# Altium PCB 400236.PcbDoc (part 3 of 7)
Units mm, origin at the board's own origin, x right, y up, seen from the top; angles counter-clockwise.
Board outline 136.53 x 63.5 mm, 4 copper layers (Top Layer, Mid-Layer 1, Mid-Layer 2, Bottom Layer), stack 1.49 mm thick; 344 components, 236 nets, 1364 pads, 1393 vias.
Unrouted connection lines stored in the file: 6.
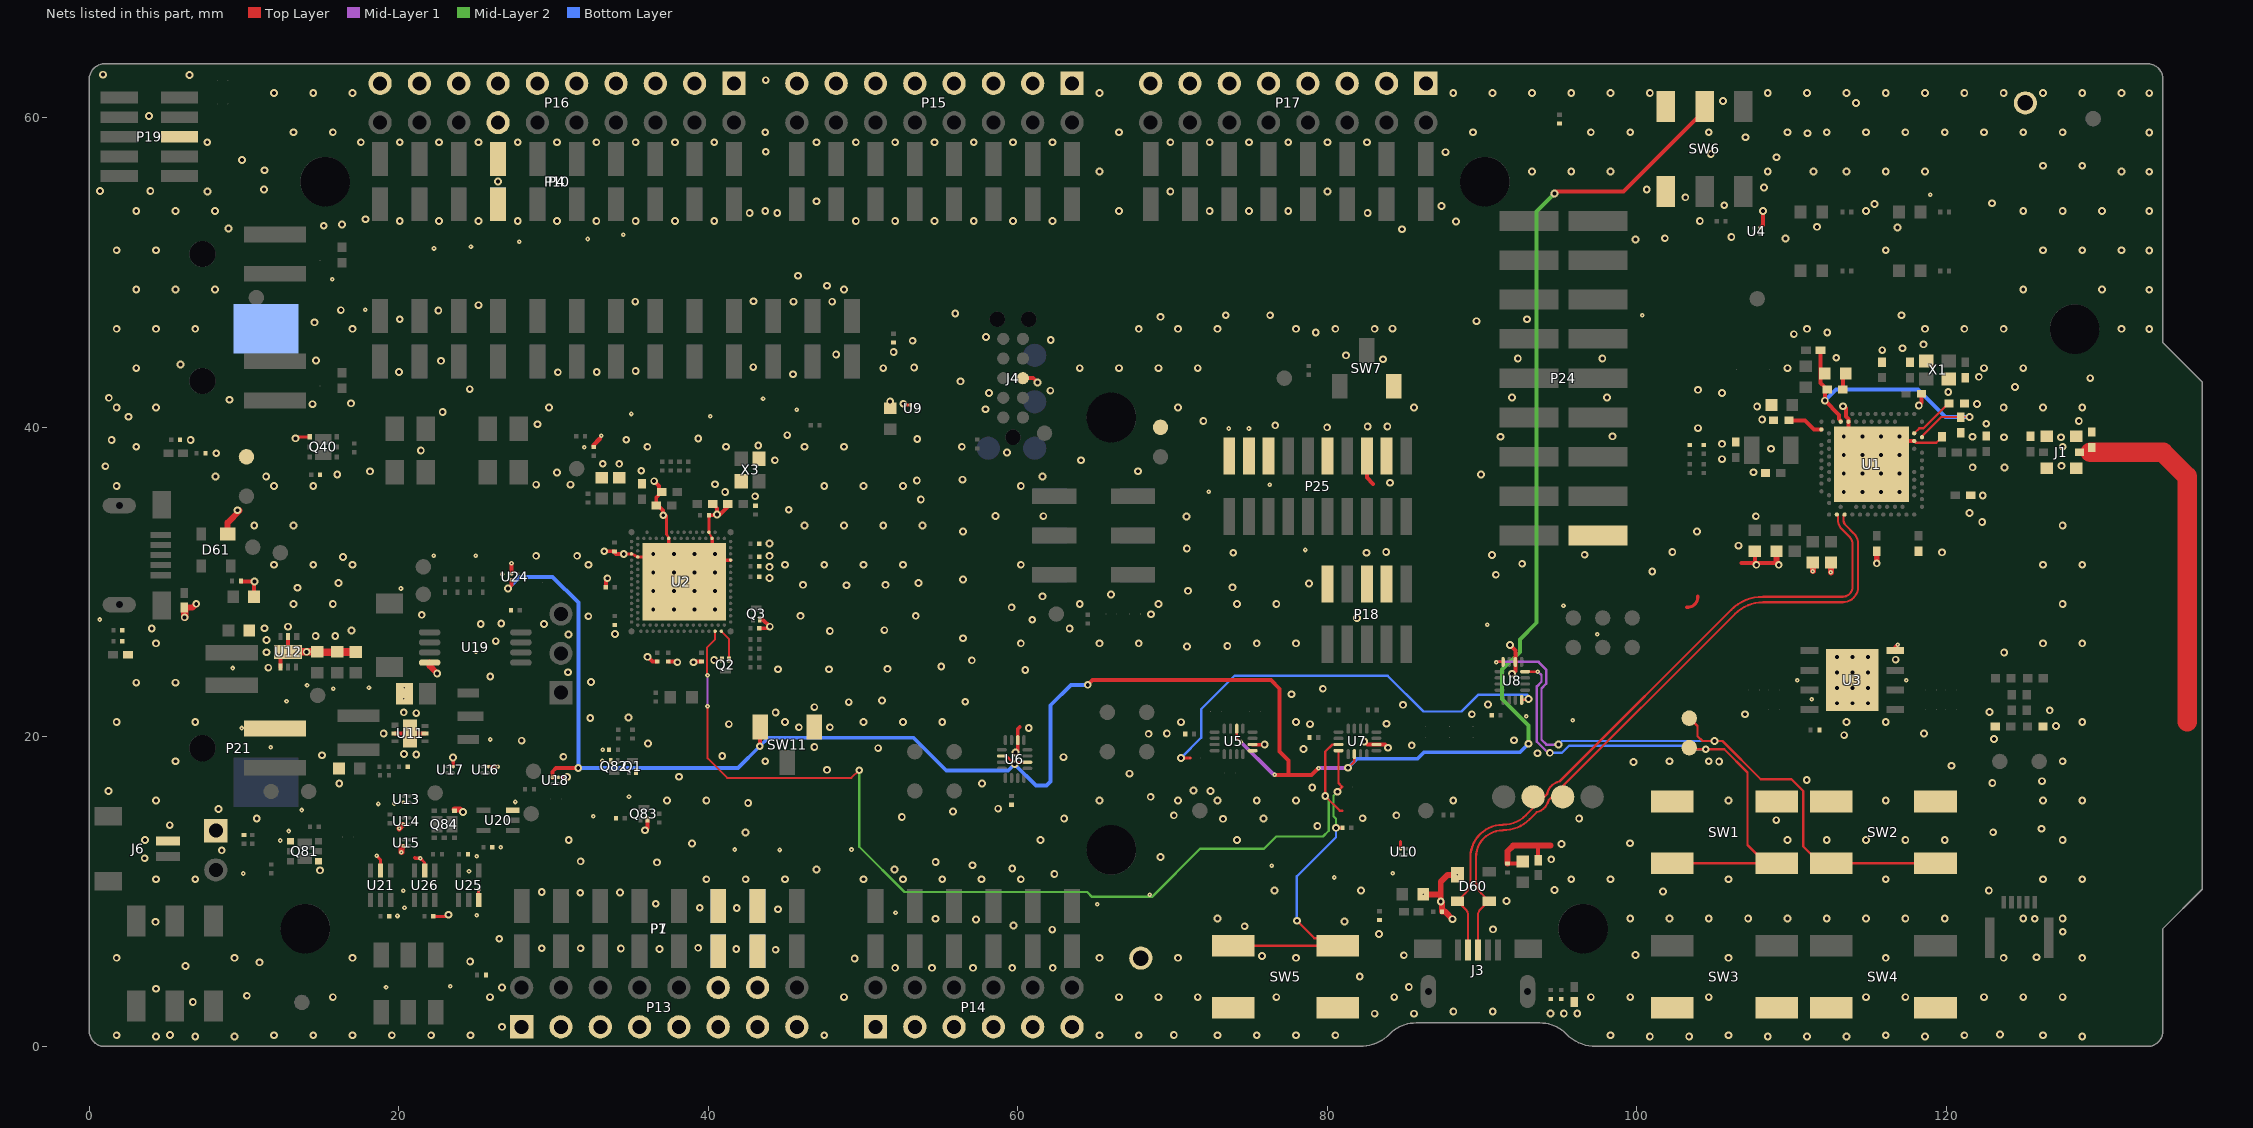
[diagram p4: the nets of this part, all layers, seen from the top]

## Part data (continued)
R3 R4 R99: library part R0201-10k, "Resistor, ±1%, 0.05W", Manufacturer=N.A., Part number IPS=00000001255, Part number NEMS=100100065, Part number Norautron=26107101, Artikkelnr Noca=N.A., Author=rsk, Component Class=Resistors, Component Status=Active, ComponentLink1Description=Datasheet, ComponentLink1URL=N.A., ComponentLink2Description="Supplier link", ComponentLink2URL=N.A., Footprint Doc=0201, HelpURL=N.A., LatestRevisionDate=2014-11-13, Manufacturer Part Number=N.A., Note="Chip Res 1%", Pad Count=2, Part Number=R0201-10k, PartId=100100065, Published=2014-11-13, Supplier 1=N.A., Supplier 2=N.A., Supplier Part Number 1=N.A., Supplier Part Number 2=N.A.
R5 R88 R92 R94: library part R0201-10M, "Resistor, ±1%, 0.05W", Manufacturer=N.A., Part number IPS=00000001426, Part number NEMS=100100105, Artikkelnr Noca=N.A., Author=rsk, Component Class=Resistors, Component Status=Active, ComponentLink1Description=Datasheet, ComponentLink1URL=N.A., ComponentLink2Description="Supplier link", ComponentLink2URL=N.A., Footprint Doc=0201, HelpURL=N.A., LatestRevisionDate=2014-11-13, Manufacturer Part Number=N.A., Note="Chip Res 1%", Pad Count=2, Part Number=R0201-10M, Part number Norautron=N.A., PartId=100100105, Published=2014-11-13, Supplier 1=N.A., Supplier 2=N.A., Supplier Part Number 1=N.A., Supplier Part Number 2=N.A.
R6 R26: library part R0201-47k, "Resistor, ±1%, 0.05W", Manufacturer=N.A., Part number IPS=00000001423, Part number NEMS=100100076, Artikkelnr Noca=N.A., Author=rsk, Component Class=Resistors, Component Status=Active, ComponentLink1Description=Datasheet, ComponentLink1URL=N.A., ComponentLink2Description="Supplier link", ComponentLink2URL=N.A., Footprint Doc=0201, HelpURL=N.A., LatestRevisionDate=2014-11-13, Manufacturer Part Number=N.A., Note="Chip Res 1%", Pad Count=2, Part Number=R0201-47k, Part number Norautron=N.A., PartId=100100076, Published=2014-11-13, Supplier 1=N.A., Supplier 2=N.A., Supplier Part Number 1=N.A., Supplier Part Number 2=N.A.
R7: library part R0201-560, "Resistor, ±1%, 0.05W", Manufacturer=N.A., Part number NEMS=100100038, Artikkelnr Noca=N.A., Author=rsk, Component Class=Resistors, Component Status=Active, ComponentLink1Description=Datasheet, ComponentLink1URL=N.A., ComponentLink2Description="Supplier link", ComponentLink2URL=N.A., Footprint Doc=0201, HelpURL=N.A., LatestRevisionDate=2014-11-13, Manufacturer Part Number=N.A., Note="Chip Res 1%", Pad Count=2, Part Number=R0201-560, Part number IPS=N.A., Part number Norautron=N.A., PartId=100100038, Published=2014-11-13, Supplier 1=N.A., Supplier 2=N.A., Supplier Part Number 1=N.A., Supplier Part Number 2=N.A.
R8 R95: library part R0201-100k, "Resistor, ±1%, 0.05W", Manufacturer=N.A., Part number IPS=00000001419, Part number NEMS=100100080, Part number Norautron=26108487, Artikkelnr Noca=N.A., Author=rsk, Component Class=Resistors, Component Status=Active, ComponentLink1Description=Datasheet, ComponentLink1URL=N.A., ComponentLink2Description="Supplier link", ComponentLink2URL=N.A., Footprint Doc=0201, HelpURL=N.A., LatestRevisionDate=2014-11-13, Manufacturer Part Number=N.A., Note="Chip Res 1%", Pad Count=2, Part Number=R0201-100k, PartId=100100080, Published=2014-11-13, Supplier 1=N.A., Supplier 2=N.A., Supplier Part Number 1=N.A., Supplier Part Number 2=N.A.
R9: library part R0201-49R9, "Resistor, ±1%, 0.05W", Manufacturer=N.A., Part number NEMS=100100612, Part number Norautron=26107071, Artikkelnr Noca=N.A., Author=getr, Component Class=Resistors, Component Status=Active, ComponentLink1Description=Datasheet, ComponentLink1URL=N.A., ComponentLink2Description="Supplier link", ComponentLink2URL=N.A., Footprint Doc=0201, HelpURL=N.A., LatestRevisionDate=2021-04-15, Manufacturer Part Number=N.A., Note="Chip Res 1%", Pad Count=2, Part Number=R0201-49R9, Part number IPS=N.A., PartId=100100612, Published=2021-04-15, Supplier 1=N.A., Supplier 2=N.A., Supplier Part Number 1=N.A., Supplier Part Number 2=N.A.
R10 R54: library part R0201-N.C., "Not mounted", Manufacturer=N.A., Part number NEMS=100100107, Artikkelnr Noca=N.A., Assembly="Not mounted", Author=rsk, Component Class=Resistors, Component Status=Active, ComponentLink1Description=Datasheet, ComponentLink1URL=N.A., ComponentLink2Description="Supplier link", ComponentLink2URL=N.A., Footprint Doc=0201, HelpURL=N.A., LatestRevisionDate=2014-11-13, Manufacturer Part Number=N.A., Note="Chip Res", Pad Count=2, Part Number=R0201-N.C., Part number IPS=N.A., Part number Norautron=N.A., PartId=100100107, Published=2014-11-13, Supplier 1=N.A., Supplier 2=N.A., Supplier Part Number 1=N.A., Supplier Part Number 2=N.A.
R11 R12 R14 R15 R16 R17 R18 R19: library part R0201-150, "Resistor, ±1%, 0.05W", Manufacturer=N.A., Part number IPS=00000001420, Part number NEMS=100100029, Artikkelnr Noca=N.A., Author=rsk, Component Class=Resistors, Component Status=Active, ComponentLink1Description=Datasheet, ComponentLink1URL=N.A., ComponentLink2Description="Supplier link", ComponentLink2URL=N.A., Footprint Doc=0201, HelpURL=N.A., LatestRevisionDate=2014-11-13, Manufacturer Part Number=N.A., Note="Chip Res 1%", Pad Count=2, Part Number=R0201-150, Part number Norautron=N.A., PartId=100100029, Published=2014-11-13, Supplier 1=N.A., Supplier 2=N.A., Supplier Part Number 1=N.A., Supplier Part Number 2=N.A.
R13: library part R0201-2R2, "Resistor, ±1%, 0.05W", Manufacturer=N.A., Part number NEMS=100100006, Part number Norautron=26470029, Artikkelnr Noca=N.A., Author=rsk, Component Class=Resistors, Component Status=Active, ComponentLink1Description=Datasheet, ComponentLink1URL=N.A., ComponentLink2Description="Supplier link", ComponentLink2URL=N.A., Footprint Doc=0201, HelpURL=N.A., LatestRevisionDate=2014-11-13, Manufacturer Part Number=N.A., Note="Chip Res 1%", Pad Count=2, Part Number=R0201-2R2, Part number IPS=N.A., PartId=100100006, Published=2014-11-13, Supplier 1=N.A., Supplier 2=N.A., Supplier Part Number 1=N.A., Supplier Part Number 2=N.A.
R20 R41 R62 R63 R68 R86 R87 R89 R96: library part R0201-1M0, "Resistor, ±1%, 0.05W", Manufacturer=N.A., Part number IPS=00000001418, Part number NEMS=100100093, Part number Norautron=26107108, Artikkelnr Noca=N.A., Author=rsk, Component Class=Resistors, Component Status=Active, ComponentLink1Description=Datasheet, ComponentLink1URL=N.A., ComponentLink2Description="Supplier link", ComponentLink2URL=N.A., Footprint Doc=0201, HelpURL=N.A., LatestRevisionDate=2014-11-13, Manufacturer Part Number=N.A., Note="Chip Res 1%", Pad Count=2, Part Number=R0201-1M0, PartId=100100093, Published=2014-11-13, Supplier 1=N.A., Supplier 2=N.A., Supplier Part Number 1=N.A., Supplier Part Number 2=N.A.
  R62 R63: Assembly="Not mounted"
R40: library part R0201-150k, "Resistor, ±1%, 0.05W", Manufacturer=N.A., Part number IPS=00000001422, Part number NEMS=100100082, Artikkelnr Noca=N.A., Author=rsk, Component Class=Resistors, Component Status=Active, ComponentLink1Description=Datasheet, ComponentLink1URL=N.A., ComponentLink2Description="Supplier link", ComponentLink2URL=N.A., Footprint Doc=0201, HelpURL=N.A., LatestRevisionDate=2014-11-13, Manufacturer Part Number=N.A., Note="Chip Res 1%", Pad Count=2, Part Number=R0201-150k, Part number Norautron=N.A., PartId=100100082, Published=2014-11-13, Supplier 1=N.A., Supplier 2=N.A., Supplier Part Number 1=N.A., Supplier Part Number 2=N.A.
R43 R45 R90 R91: library part R0402-N.C., "Not mounted", Manufacturer=N.A., Part number NEMS=100100281, Artikkelnr Noca=N.A., Assembly="Not mounted", Author=rsk, Component Class=Resistors, Component Status=Active, ComponentLink1Description=Datasheet, ComponentLink1URL=N.A., ComponentLink2Description="Supplier link", ComponentLink2URL=N.A., Footprint Doc=0402, HelpURL=N.A., LatestRevisionDate=2009-05-08, Manufacturer Part Number=N.A., Note="Chip Res", Pad Count=2, Part Number=R0402-N.C., Part number IPS=N.A., Part number Norautron=N.A., PartId=100100281, Published=2009-05-08, Supplier 1=N.A., Supplier 2=N.A., Supplier Part Number 1=N.A., Supplier Part Number 2=N.A.
R44 R46: library part R0402-0R, "Resistor, ±5%, 0.063W", Manufacturer=N.A., Part number IPS=00000007128, Part number NEMS=100100109, Supplier Part Number 1=146-9661, Artikkelnr Noca=27049000, Author=rsk, Component Class=Resistors, Component Status=Active, ComponentLink1Description=Datasheet, ComponentLink1URL=N.A., ComponentLink2Description="Supplier link", ComponentLink2URL=N.A., Footprint Doc=0402, HelpURL=N.A., LatestRevisionDate=2009-11-23, Manufacturer Part Number=N.A., Note="Chip Res 5%", Pad Count=2, Part Number=R0402-0R, Part number Norautron=N.A., PartId=100100109, Published=2009-05-08, Supplier 1=Farnell, Supplier 2=N.A., Supplier Part Number 2=N.A.
R47 R48 R50 R51: library part R0201-220, "Resistor, ±1%, 0.05W", Manufacturer=N.A., Part number IPS=00000000863, Part number NEMS=100100032, Part number Norautron=26107014, Artikkelnr Noca=N.A., Author=rsk, Component Class=Resistors, Component Status=Active, ComponentLink1Description=Datasheet, ComponentLink1URL=N.A., ComponentLink2Description="Supplier link", ComponentLink2URL=N.A., Footprint Doc=0201, HelpURL=N.A., LatestRevisionDate=2014-11-13, Manufacturer Part Number=N.A., Note="Chip Res 1%", Pad Count=2, Part Number=R0201-220, PartId=100100032, Published=2014-11-13, Supplier 1=N.A., Supplier 2=N.A., Supplier Part Number 1=N.A., Supplier Part Number 2=N.A.
R52 R53: library part R0201-4k7, "Resistor, ±1%, 0.05W", Manufacturer=N.A., Part number IPS=00000001706, Part number NEMS=100100061, Artikkelnr Noca=N.A., Author=rsk, Component Class=Resistors, Component Status=Active, ComponentLink1Description=Datasheet, ComponentLink1URL=N.A., ComponentLink2Description="Supplier link", ComponentLink2URL=N.A., Footprint Doc=0201, HelpURL=N.A., LatestRevisionDate=2014-11-13, Manufacturer Part Number=N.A., Note="Chip Res 1%", Pad Count=2, Part Number=R0201-4k7, Part number Norautron=N.A., PartId=100100061, Published=2014-11-13, Supplier 1=N.A., Supplier 2=N.A., Supplier Part Number 1=N.A., Supplier Part Number 2=N.A.
R69: library part R0201-866, "Resistor, ±1%, 0.05W", Manufacturer=N.A., Part number IPS=00000004368, Part number NEMS=100100042, Artikkelnr Noca=N.A., Author=rsk, Component Class=Resistors, Component Status=Active, ComponentLink1Description=Datasheet, ComponentLink1URL=N.A., ComponentLink2Description="Supplier link", ComponentLink2URL=N.A., Footprint Doc=0201, HelpURL=N.A., LatestRevisionDate=2019-07-16, Manufacturer Part Number=N.A., Note="Chip Res 1%", Pad Count=2, Part Number=R0201-866, Part number Norautron=N.A., PartId=100100042, Published=2019-07-16, Supplier 1=N.A., Supplier 2=N.A., Supplier Part Number 1=N.A., Supplier Part Number 2=N.A.
R82: library part R0201-330k, "Resistor, ±1%, 0.05W", Manufacturer=N.A., Part number IPS=00000001424, Part number NEMS=100100087, Artikkelnr Noca=N.A., Author=rsk, Component Class=Resistors, Component Status=Active, ComponentLink1Description=Datasheet, ComponentLink1URL=N.A., ComponentLink2Description="Supplier link", ComponentLink2URL=N.A., Footprint Doc=0201, HelpURL=N.A., LatestRevisionDate=2014-11-13, Manufacturer Part Number=N.A., Note="Chip Res 1%", Pad Count=2, Part Number=R0201-330k, Part number Norautron=N.A., PartId=100100087, Published=2014-11-13, Supplier 1=N.A., Supplier 2=N.A., Supplier Part Number 1=N.A., Supplier Part Number 2=N.A.
R83: library part R0201-820k, "Resistor, ±1%, 0.05W", Manufacturer=N.A., Part number IPS=00000001427, Part number NEMS=100100092, Artikkelnr Noca=N.A., Author=rsk, Component Class=Resistors, Component Status=Active, ComponentLink1Description=Datasheet, ComponentLink1URL=N.A., ComponentLink2Description="Supplier link", ComponentLink2URL=N.A., Footprint Doc=0201, HelpURL=N.A., LatestRevisionDate=2014-11-13, Manufacturer Part Number=N.A., Note="Chip Res 1%", Pad Count=2, Part Number=R0201-820k, Part number Norautron=N.A., PartId=100100092, Published=2014-11-13, Supplier 1=N.A., Supplier 2=N.A., Supplier Part Number 1=N.A., Supplier Part Number 2=N.A.
R84: library part R0201-120k, "Resistor, ±1%, 0.05W", Manufacturer=N.A., Part number IPS=00000001425, Part number NEMS=100100081, Artikkelnr Noca=N.A., Author=rsk, Component Class=Resistors, Component Status=Active, ComponentLink1Description=Datasheet, ComponentLink1URL=N.A., ComponentLink2Description="Supplier link", ComponentLink2URL=N.A., Footprint Doc=0201, HelpURL=N.A., LatestRevisionDate=2014-11-13, Manufacturer Part Number=N.A., Note="Chip Res 1%", Pad Count=2, Part Number=R0201-120k, Part number Norautron=N.A., PartId=100100081, Published=2014-11-13, Supplier 1=N.A., Supplier 2=N.A., Supplier Part Number 1=N.A., Supplier Part Number 2=N.A.
R85: library part R0201-470k, "Resistor, ±1%, 0.05W", Manufacturer=N.A., Part number IPS=00000001428, Part number NEMS=100100089, Artikkelnr Noca=N.A., Author=rsk, Component Class=Resistors, Component Status=Active, ComponentLink1Description=Datasheet, ComponentLink1URL=N.A., ComponentLink2Description="Supplier link", ComponentLink2URL=N.A., Footprint Doc=0201, HelpURL=N.A., LatestRevisionDate=2014-11-13, Manufacturer Part Number=N.A., Note="Chip Res 1%", Pad Count=2, Part Number=R0201-470k, Part number Norautron=N.A., PartId=100100089, Published=2014-11-13, Supplier 1=N.A., Supplier 2=N.A., Supplier Part Number 1=N.A., Supplier Part Number 2=N.A.
R93: library part R0201-1k0, "Resistor, ±1%, 0.05W", Manufacturer=N.A., Part number IPS=00000005786, Part number NEMS=100100043, Artikkelnr Noca=N.A., Author=rsk, Component Class=Resistors, Component Status=Active, ComponentLink1Description=Datasheet, ComponentLink1URL=N.A., ComponentLink2Description="Supplier link", ComponentLink2URL=N.A., Footprint Doc=0201, HelpURL=N.A., LatestRevisionDate=2014-11-13, Manufacturer Part Number=N.A., Note="Chip Res 1%", Pad Count=2, Part Number=R0201-1k0, Part number Norautron=N.A., PartId=100100043, Published=2014-11-13, Supplier 1=N.A., Supplier 2=N.A., Supplier Part Number 1=N.A., Supplier Part Number 2=N.A.
R97 R98: library part R0201-4R7, "Resistor, ±1%, 0.05W", Manufacturer=N.A., Part number IPS=00000002486, Part number NEMS=100100010, Artikkelnr Noca=N.A., Author=rsk, Component Class=Resistors, Component Status=Active, ComponentLink1Description=Datasheet, ComponentLink1URL=N.A., ComponentLink2Description="Supplier link", ComponentLink2URL=N.A., Footprint Doc=0201, HelpURL=N.A., LatestRevisionDate=2014-11-13, Manufacturer Part Number=N.A., Note="Chip Res 1%", Pad Count=2, Part Number=R0201-4R7, Part number Norautron=N.A., PartId=100100010, Published=2014-11-13, Supplier 1=N.A., Supplier 2=N.A., Supplier Part Number 1=N.A., Supplier Part Number 2=N.A.
SB1 SB2 SB5 SB6 SB7 SB8 SB10 SB11 SB12 SB13 SB14 SB15 SB16 SB33 SB38 SB40 SB41 SB42 SB50 SB51 SB52 SB53 SB54 SB55 SB56 SB57 SB58 SB60: library part "Solderbridge Shorted", "Shorted Solderbridge", Manufacturer=N.A., Part number NEMS=100500459, Artikkelnr Noca=N.A., Author=rsk, Component Class=Connectors, Component Status=Active, ComponentLink1Description=Datasheet, ComponentLink1URL=N.A., ComponentLink2Description="Supplier link", ComponentLink2URL=N.A., Footprint Doc=Solderbridge_Shorted, HelpURL=N.A., LatestRevisionDate=2012-08-07, Manufacturer Part Number=N.A., Note=N.A., Pad Count=2, Part Number="Solderbridge Shorted", Part number IPS=N.A., Part number Norautron=N.A., PartId=100500459, Published=2012-08-07, Supplier 1=N.A., Supplier 2=N.A., Supplier Part Number 1=N.A., Supplier Part Number 2=N.A., System=Connector
SB3 SB4 SB9 SB17 SB18 SB19 SB20 SB21 SB22 SB23 SB24 SB25 SB31 SB32 SB34 SB36 SB37 SB39 SB43 SB44 SB45 SB46 SB47 SB48 SB59 SB80 SB81: Manufacturer=N.A., Part number NEMS=100500458, Artikkelnr Noca=N.A., Author=rsk, Component Class=Connectors, Component Status=Active, ComponentLink1Description=Datasheet, ComponentLink1URL=N.A., ComponentLink2Description="Supplier link", ComponentLink2URL=N.A., Footprint Doc=Solderbridge, HelpURL=N.A., LatestRevisionDate=2009-12-14, Manufacturer Part Number=N.A., Note=N.A., Pad Count=2, Part Number=Solderbridge, Part number IPS=N.A., Part number Norautron=N.A., PartId=100500458, Published=2009-12-14, Supplier 1=N.A., Supplier 2=N.A., Supplier Part Number 1=N.A., Supplier Part Number 2=N.A., System=Connector
SW1 SW2 SW3 SW4 SW5: library part Switch-PB-6.2x6.3mm-SMD, "Tactile Switch, SPNO, SMD, 160gf, 6.2x6.3x2.5mm", Manufacturer=Dailywell, Manufacturer Part Number=TS604VM1-025BR-R, Part number IPS=00000007812, Part number NEMS="101500001, 101500133", Part number Norautron=N.A., Artikkelnr Noca=50019106, Author=rsk, Component Class=Switches, Component Status=Active, ComponentLink1Description=Datasheet, ComponentLink1URL=N.A., ComponentLink2Description="Supplier link", ComponentLink2URL=N.A., Footprint Doc=Switch-PB-6.2x6.3mm-SMD, HelpURL=\\hizz\pro\app9717\Datasheet\switches\Dailywell\TS604VM1-025BR-R.pdf, LatestRevisionDate=2016-04-21, Note=N.A., Pad Count=4, Part Number=Switch-PB-6.2x6.3mm-SMD, PartId=101500001, Published=2010-02-01, Supplier 1=Cabcon, Supplier 2=Mouser, Supplier Part Number 1=TS604VM1-025BR-R, Supplier Part Number 2=688-SKHUALE010
SW6 SW8: "Slide Switch DPDT", Manufacturer=Dailywell, Part number IPS=00000004369, Part number NEMS=101500096, Part number Norautron=N.A., Artikkelnr Noca=50019112, Author=rsk, Component Class=Switches, Component Status=Active, ComponentLink1Description=Datasheet, ComponentLink1URL=N.A., ComponentLink2Description="Supplier link", ComponentLink2URL=N.A., Footprint Doc=MKH-22D14-G2-B, HelpURL=\\hizz\pro\app9717\Datasheet\switches\Dailywell\MKH-22D14-G2-B.pdf, LatestRevisionDate=2016-08-18, Manufacturer Part Number=MKH-22D14-G2-B, Note=N.A., Pad Count=6, Part Number=MKH-22D14-G2-B, PartId=101500096, Published=2016-08-18, Supplier 1=Cabcon, Supplier 2=N.A., Supplier Part Number 1=MKH-22D14-G2-B, Supplier Part Number 2=N.A.
SW7 SW11: library part CJS-1200TA, "SMD slide Switch (ON-ON)", Manufacturer="Copal Electronics Inc", Part number IPS=00000009982, Part number NEMS=101500005, Part number Norautron=26030738, Supplier Part Number 1=563-1021-2-ND, Artikkelnr Noca=50019068, Author=rsk, Component Class=Switches, Component Status=Active, ComponentLink1Description=Datasheet, ComponentLink1URL=N.A., ComponentLink2Description="Supplier link", ComponentLink2URL=N.A., Footprint Doc=CJS-120xA, HelpURL=http://media.digikey.com/pdf/Data%20Sheets/COPAL%20Electronics%20PDFs/CJS.pdf, LatestRevisionDate=2012-10-03, Manufacturer Part Number=CJS-1200TA, Note=N.A., Pad Count=3, Part Number=CJS-1200TA, PartId=101500005, Published=2012-10-03, Supplier 1=Digi-Key, Supplier 2=N.A., Supplier Part Number 2=N.A.
SW9: "Slide Switch DP3T 300mA 6V", Manufacturer=C&K, Part number IPS=00000004321, Part number NEMS=101500099, Part number Norautron=N.A., Supplier Part Number 1=CKN10725CT-ND, Artikkelnr Noca=50019116, Author=rsk, Component Class=Switches, Component Status=Active, ComponentLink1Description=Datasheet, ComponentLink1URL=N.A., ComponentLink2Description="Supplier link", ComponentLink2URL=N.A., Footprint Doc=Switch-Slide-J-Lead-DP3T-13x3.5mm, HelpURL=http://www.ckswitches.com/media/1422/js.pdf, LatestRevisionDate=2016-10-05, Manufacturer Part Number=JS203011JCQN, Note=N.A., Pad Count=8, Part Number=JS203011JCQN, PartId=101500099, Published=2016-10-05, Supplier 1=Digi-Key, Supplier 2=N.A., Supplier Part Number 2=N.A.
SW10: "Slide Switch DPDT J Hook", Manufacturer="Copal Electronics Inc", Part number IPS=00000009983, Part number NEMS=101500003, Part number Norautron=N.A., Supplier Part Number 1=CAS220JTR-ND, Artikkelnr Noca=50019042, Author=rsk, Component Class=Switches, Component Status=Active, ComponentLink1Description=Datasheet, ComponentLink1URL=N.A., ComponentLink2Description="Supplier link", ComponentLink2URL=N.A., Footprint Doc=CAS-220TA, HelpURL=http://media.digikey.com/pdf/Data%20Sheets/COPAL%20Electronics%20PDFs/CAS%20SMD%20Slide%20Switch.pdf, LatestRevisionDate=2010-02-18, Manufacturer Part Number=CAS-220TA, Note=N.A., Pad Count=6, Part Number=CAS-220TA, PartId=101500003, Published=2010-02-18, Supplier 1=Digi-Key, Supplier 2=N.A., Supplier Part Number 2=N.A.
TP1 TP2 TP3 TP4 TP5 TP6 TP7 TP8 TP9 TP10 TP11 TP12 TP17 TP18 TP19 TP20 TP21 TP22 TP23 TP24 TP25 TP26 TP27 TP28 TP29 TP30 TP31 TP32 TP33 TP34 TP35 TP36 TP37 TP38 TP39 TP42 TP43 TP44 TP45 TP46 TP47: library part TP_SMD_Ø1.0MM, "1.0mm circular SMD testpad", Manufacturer="Nordic Semiconductor", Manufacturer Part Number=N.A., Part number NEMS=100500475, Artikkelnr Noca=N.A., Author=rsk, Component Class=Connectors, Component Status=Active, ComponentLink1Description=Datasheet, ComponentLink1URL=N.A., ComponentLink2Description="Supplier link", ComponentLink2URL=N.A., Footprint Doc=TP_SMD_Ø1.0mm, HelpURL=N.A., LatestRevisionDate=2021-03-05, Note=N.A., Pad Count=1, Part Number=TP_SMD_Ø1.0MM, Part number IPS=N.A., Part number Norautron=N.A., PartId=100500475, Published=2013-06-11, Supplier 1=N.A., Supplier 2=N.A., Supplier Part Number 1=N.A., Supplier Part Number 2=N.A.
TP13 TP14 TP15 TP16 TP48 TP49 TP50 TP51: library part TP_SMD_Ø1.5MM, "1.5mm circular SMD testpad", Manufacturer="Nordic Semiconductor", Manufacturer Part Number=N.A., Part number NEMS=100500477, Artikkelnr Noca=N.A., Author=rsk, Component Class=Connectors, Component Status=Active, ComponentLink1Description=Datasheet, ComponentLink1URL=N.A., ComponentLink2Description="Supplier link", ComponentLink2URL=N.A., Footprint Doc=TP_SMD_Ø1.5mm, HelpURL=N.A., LatestRevisionDate=2021-03-05, Note=N.A., Pad Count=1, Part Number=TP_SMD_Ø1.5MM, Part number IPS=N.A., Part number Norautron=N.A., PartId=100500477, Published=2016-06-02, Supplier 1=N.A., Supplier 2=N.A., Supplier Part Number 1=N.A., Supplier Part Number 2=N.A.
TP40 TP41: library part "Testpoint TH", "Testpoint, through hole", Manufacturer=N.A., Part number NEMS=100500464, Artikkelnr Noca=N.A., Author=rsk, Component Class=Connectors, Component Status=Active, ComponentLink1Description=Datasheet, ComponentLink1URL=N.A., ComponentLink2Description="Supplier link", ComponentLink2URL=N.A., Footprint Doc=TESTPAD-TH, HelpURL=N.A., LatestRevisionDate=2009-12-12, Manufacturer Part Number=N.A., Note=N.A., Pad Count=1, Part Number="Testpoint TH", Part number IPS=N.A., Part number Norautron=N.A., PartId=100500464, Published=2009-12-12, Supplier 1=N.A., Supplier 2=N.A., Supplier Part Number 1=N.A., Supplier Part Number 2=N.A.
U1: library part nRF52840-QIAAF0, "Multi-protocol Bluetooth Low Energy, IEEE 802.15.4, ANT and 2.4GHz proprietary system-on-chip", Manufacturer="Nordic Semiconductor", Part number IPS=80000002377, Part number NEMS=102000222, Part number Norautron=N.A., Artikkelnr Noca=N.A., Author=hany, Component Class=Nordic_Devices, Component Status=Active, ComponentLink1Description=Datasheet, ComponentLink1URL=N.A., ComponentLink2Description="Supplier link", ComponentLink2URL=N.A., Footprint Doc=AQFN-73, HelpURL=N.A., LatestRevisionDate=2021-03-24, Manufacturer Part Number=nRF52840-QIAAF0, Note=N.A., Pad Count=73, Part Number=nRF52840-QIAAF0, PartId=102000222, Published=2021-03-24, Supplier 1="Nordic Semiconductor", Supplier 2=N.A., Supplier Part Number 1=nRF52840-QIAAF0, Supplier Part Number 2=N.A.
U2: library part nRF5340-QKAAD0, "Multi-protocol Bluetooth Low Energy, IEEE 802.15.4, ANT and 2.4GHz proprietary system-on-chip", Manufacturer="Nordic Semiconductor", Part number IPS=N.A., Part number NEMS=102000216, Part number Norautron=NOD26470035, Artikkelnr Noca=N.A., Author=rsk, Component Class=Nordic_Devices, Component Status=Active, ComponentLink1Description=Datasheet, ComponentLink1URL=N.A., ComponentLink2Description="Supplier link", ComponentLink2URL=N.A., Footprint Doc=AQFN-98, HelpURL=N.A., LatestRevisionDate=2020-12-02, Manufacturer Part Number=nRF5340-QKAAD0, Note=N.A., Pad Count=98, Part Number=nRF5340-QKAAD0, PartId=102000216, Published=2020-12-02, Supplier 1="Nordic Semiconductor", Supplier 2=N.A., Supplier Part Number 1=nRF5340-QKAAD0, Supplier Part Number 2=N.A.
U3: library part MX25R6435FZNIL0, "Ultra low power, 64M-bit, serial multi I/O flash memory", Manufacturer=Macronix, Part number IPS=00000004370, Part number NEMS=101900438, Part number Norautron=N.A., Artikkelnr Noca=15020015, Author=rsk, Component Class=Misc_ICs, Component Status=Active, ComponentLink1Description=Datasheet, ComponentLink1URL=N.A., ComponentLink2Description="Supplier link", ComponentLink2URL=N.A., Footprint Doc=WSON-8, HelpURL=https://www.macronix.com/Lists/Datasheet/Attachments/7913/MX25R6435F,%20Wide%20Range,%2064Mb,%20v1.5.pdf, LatestRevisionDate=2021-02-26, Manufacturer Part Number=MX25R6435FZNIL0, Note=N.A., Pad Count=8, Part Number=MX25R6435FZNIL0, PartId=101900438, Published=2016-06-29, Supplier 1=Future, Supplier 2=Arrow, Supplier Part Number 1=MX25R6435FZNIL0, Supplier Part Number 2=MX25R6435FZNIL0
U4 U9 U10 U13 U14 U15 U16 U17 U18 U24: "1.0 A Load Switch IC with Slew Rate Control Driver in Ultra Small Package", Manufacturer=Toshiba, Manufacturer Part Number=TCK106AG,LF, Part number IPS=00000004390, Part number NEMS=101900575, Part number Norautron=26500627, Supplier Part Number 1=TCK106AGLFTR-ND, Artikkelnr Noca=N.A., Author=rsk, Component Class=Misc_ICs, Component Status=Active, ComponentLink1Description=Datasheet, ComponentLink1URL=https://toshiba.semicon-storage.com/info/docget.jsp?did=30131&prodName=TCK106AG, ComponentLink2Description="Supplier link", ComponentLink2URL=N.A., Footprint Doc=WLCSP-4, HelpURL=N.A., LatestRevisionDate=2019-03-01, Note=N.A., Pad Count=4, Part Number=TCK106AG, PartId=101900575, Published=2019-02-17, Supplier 1=Digi-Key, Supplier 2=Mouser, Supplier Part Number 2=757-TCK106AGLF
U5 U6 U7 U8: "Data / Audio Low-Voltage Dual DPDT Analog Switch", Manufacturer="ON Semiconductor", Part number IPS=00000009986, Part number NEMS=101900422, Part number Norautron=26500608, Supplier Part Number 1=FSA2466UMXCT-ND, Artikkelnr Noca=15070069, Author=rsk, Component Class=Misc_ICs, Component Status=Active, ComponentLink1Description=Datasheet, ComponentLink1URL=N.A., ComponentLink2Description="Supplier link", ComponentLink2URL=N.A., Footprint Doc=UFQFN-16, HelpURL=https://www.onsemi.com/pub/Collateral/FSA2466-D.PDF, LatestRevisionDate=2019-05-15, Manufacturer Part Number=FSA2466UMX, Note=N.A., Pad Count=16, Part Number=FSA2466UMX, PartId=101900422, Published=2016-05-18, Supplier 1=Digi-Key, Supplier 2=Mouser, Supplier Part Number 2=512-FSA2466UMX
U11: library part XC9236D08CER-G, "600mA Driver Transistor Built-In, Synchronous Step-Down DC/DC Converters", Manufacturer="Torex Semiconductor", Part number IPS=00000004325, Part number NEMS=101900207, Part number Norautron=N.A., Supplier Part Number 1=865-XC9236D08CER-G, Artikkelnr Noca=17030085, Author=rsk, Component Class=Misc_ICs, Component Status=Active, ComponentLink1Description=Datasheet, ComponentLink1URL=N.A., ComponentLink2Description="Supplier link", ComponentLink2URL=N.A., Footprint Doc=USP-6C, HelpURL=http://www.torexsemi.com/products/dcdc_converters/data/XC9235~37.pdf, LatestRevisionDate=2017-11-15, Manufacturer Part Number=XC9236D08CER-G, Note=N.A., Pad Count=6, Part Number=XC9236D08CER-G, PartId=101900207, Published=2017-11-15, Supplier 1=Mouser, Supplier 2=Digi-Key, Supplier Part Number 2=XC9236D08CER-G-ND
U12: library part XC9148A50CER-G, "1.4A Driver Transistor Built-In, Multi Functional Step-Up DC/DC Converter", Manufacturer="Torex Semiconductor", Part number IPS=N.A., Part number NEMS=101900670, Artikkelnr Noca=N.A., Author=hany, Component Class=Misc_ICs, Component Status=Active, ComponentLink1Description=Datasheet, ComponentLink1URL=https://www.torexsemi.com/file/XC9147/XC9147.pdf, ComponentLink2Description="Supplier link", ComponentLink2URL=N.A., Footprint Doc=USP-6C, HelpURL=https://www.torexsemi.com/file/XC9147/XC9147.pdf, LatestRevisionDate=2021-10-26, Manufacturer Part Number=XC9148A50CER-G, Note=N.A., Pad Count=6, Part Number=XC9148A50CER-G, Part number Norautron=N.A., PartId=101900670, Published=2021-10-26, Supplier 1=N.A., Supplier 2=N.A., Supplier Part Number 1=N.A., Supplier Part Number 2=N.A.
U19: "Precision very low power CMOS dual operational amplifier", Manufacturer=STMicroelectronics, Part number IPS=00000009991, Part number NEMS=101900442, Part number Norautron=N.A., Supplier Part Number 1=497-8085-1-ND, Artikkelnr Noca=17010019, Author=rsk, Component Class=Misc_ICs, Component Status=Active, ComponentLink1Description=Datasheet, ComponentLink1URL=N.A., ComponentLink2Description="Supplier link", ComponentLink2URL=N.A., Footprint Doc=TSSOP-8, HelpURL=http://www.st.com/content/ccc/resource/technical/document/datasheet/38/5b/ca/bd/c0/26/4a/34/CD00000880.pdf/files/CD00000880.pdf/jcr:content/translations/en.CD00000880.pdf, LatestRevisionDate=2016-07-07, Manufacturer Part Number=TS27L2IPT, Note=N.A., Pad Count=8, Part Number=TS27L2IPT, PartId=101900442, Published=2016-07-07, Supplier 1=Digi-Key, Supplier 2=N.A., Supplier Part Number 2=N.A.
U20 U25: library part 74LVC1G08GW, "Single 2-Input AND Gate", Manufacturer="NXP Semiconductors", Part number IPS=00000009992, Part number NEMS=101900155, Part number Norautron=N.A., Supplier Part Number 1=568-1580-1-ND, Artikkelnr Noca=15049058, Author=rsk, Component Class=Misc_ICs, Component Status=Active, ComponentLink1Description=Datasheet, ComponentLink1URL=N.A., ComponentLink2Description="Supplier link", ComponentLink2URL=N.A., Footprint Doc=SC70-5, HelpURL=http://www.nxp.com/documents/data_sheet/74LVC1G08.pdf, LatestRevisionDate=2016-10-18, Manufacturer Part Number=74LVC1G08GW, Note="Single 2-Input AND Gate", Pad Count=5, Part Number=74LVC1G08GW, PartId=101900155, Published=2016-10-18, Supplier 1=Digi-Key, Supplier 2=Farnell, Supplier Part Number 2=242-8299
U21 U26: library part 74LVC1G11GW, "Single 3-input AND gate", Manufacturer="NXP Semiconductors", Part number IPS=00000001430, Part number NEMS=101900157, Part number Norautron=N.A., Supplier Part Number 1=568-7757-1-ND, Artikkelnr Noca=15079348, Author=rsk, Component Class=Misc_ICs, Component Status=Active, ComponentLink1Description=Datasheet, ComponentLink1URL=N.A., ComponentLink2Description="Supplier link", ComponentLink2URL=N.A., Footprint Doc=SC70-6, HelpURL=http://www.nxp.com/documents/data_sheet/74LVC1G11.pdf, LatestRevisionDate=2016-10-18, Manufacturer Part Number=74LVC1G11GW, Note="Single 3-input AND gate", Pad Count=6, Part Number=74LVC1G11GW, PartId=101900157, Published=2016-10-18, Supplier 1=Digi-Key, Supplier 2=Farnell, Supplier Part Number 2=243-8826
X1 X3: library part XTAL_SMD2016_32MHz_8pF_Golledge_MP12308, "XTAL SMD 2016, 32MHz, Cl=8pF, Tol: ±10ppm, Stab: ±15ppm, -30°C ~ 85°C, ESR: 50ohm max", Manufacturer=Golledge, Manufacturer Part Number=MP12308, Part number IPS=N.A., Part number NEMS=101600118,101600041, Artikkelnr Noca=N.A., Author=rubr, Component Class=Oscillators, Component Status=Active, ComponentLink1Description=Datasheet, ComponentLink1URL=\\hizz\pro\app9717\Datasheet\crystals\Golledge\mp12308.pdf, ComponentLink2Description="Supplier link", ComponentLink2URL=N.A., Footprint Doc=XTAL_2016, HelpURL=N.A., LatestRevisionDate=2024-04-26, Note="XTAL SMD 32.000MHz", Pad Count=4, Part Number=XTAL_SMD2016_32MHz_8pF_Golledge_MP12308, Part number Norautron=N.A., PartId=101600118, Published=2024-04-26, Supplier 1="Link Nordic", Supplier 2=N.A., Supplier Part Number 1=N.A., Supplier Part Number 2=N.A.
X2: library part XTAL_SMD3215_32.768kHz_9pF_NDK, "XTAL SMD 3215, 32.768kHz, 9pF, ±20ppm", Manufacturer=NDK, Manufacturer Part Number=NX3215SA-32.768K-STD-MUA-9, Part number IPS=00000005419, Part number NEMS=101600019, Part number Norautron=N.A., Artikkelnr Noca=22010049, Author=rsk, Component Class=Oscillators, Component Status=Active, ComponentLink1Description=Datasheet, ComponentLink1URL=N.A., ComponentLink2Description="Supplier link", ComponentLink2URL=N.A., Footprint Doc=XTAL_3215, HelpURL=N.A., LatestRevisionDate=2017-10-23, Note="XTAL SMD 32.768kHz", Pad Count=2, Part Number=XTAL_SMD3215_32.768kHz_9pF_NDK, PartId=101600019, Published=2017-10-23, Supplier 1=N.A., Supplier 2=N.A., Supplier Part Number 1=N.A., Supplier Part Number 2=N.A.

## Free pads (board coordinates)
  round 3.2 hole 3.2 unplated: 1(13.97,7.62) 1(15.24,55.88) 1(66.04,12.7) 1(66.04,40.64) 1(90.17,55.88) 1(96.52,7.62) 1(128.27,46.355)

## Via types
v1: diameter 0.5, hole 0.25, Top Layer to Bottom Layer, tented both sides, 1166 vias
v2: diameter 0.3, hole 0.1, Top Layer to Mid-Layer 1, tented top, 227 vias

## Nets (pads, with @x,y where several pads share a name; then routed paths per layer and width w, separated by ;. In a path a pad name is that pad's centre, name@x,y a point inside that pad or via, vN(x,y) a via of type N, cw(c..) or ccw(c..) an arc to the next point about the centre after c; other vN are vias at no path point)
ANT: C23.1 J1.3 | length 22.7
  Top Layer w1.27: 129.303,38.391 133.992,38.391 135.551,36.832 135.551,20.99
BOOT/RESET: R54.1 SB43.1 SW5.2 U7.16 | length 22
  Top Layer w0.152: SW5.2@73.917,6.502 SW5.2@79.655,6.502 ; v1(78.029,8.128) 79.153,7.004 79.368,7.004 79.655,6.717 SW5.2@79.655,6.502 ; v1(80.645,16.459) 80.95,16.764 80.95,16.782 80.715,17.016 U7.16@80.715,19.11 U7.16@80.68,19.11 ; SW5.2@80.667,6.502 79.913,6.502 SW5.2@79.655,6.502
  Top Layer w0.203: v1(80.55,14.125) R54.1@80.965,14.125
  Mid-Layer 2 w0.152: v1(80.55,14.125) 80.55,14.716 80.391,14.875 80.391,16.196 80.645,16.45 v1(80.645,16.459)
  Bottom Layer w0.152: v1(78.029,8.128) 78.029,11.004 80.55,13.525 v1(80.55,14.125)
BUTTON1: SW1.2 TP20.1 U8.4 | length 35.3
  Top Layer w0.152: U8.4@92.773,24.222 93.609,24.222 v2@93.624,24.206 ; SW1.2@102.278,11.83 SW1.2@108.331,11.83 ; TP20.1@103.378,19.304 103.48,19.202 v1(104.445,19.202) 105.634,19.202 107.137,17.699 107.137,13.024 SW1.2@108.331,11.83 ; SW1.2@109.707,11.83 SW1.2@109.028,11.83 SW1.2@108.331,11.83
  Mid-Layer 1 w0.152: v2@93.624,24.206 93.828,24.003 93.828,23.562 93.531,23.266 93.531,19.693 94.251,18.974 v1(94.369,18.974)
  Bottom Layer w0.152: v1(94.369,18.974) 95.149,18.974 95.606,19.431 103.454,19.431 103.683,19.202 v1(104.445,19.202)
  other v2: 93.599,24.206
BUTTON2: SW2.2 TP21.1 U8.8 | length 42.9
  Top Layer w0.152: v2@90.887,24.847 U8.8@91.348,24.847 ; TP21.1@103.378,21.234 103.914,20.699 103.914,20.049 104.227,19.736 v1(105.004,19.736) 105.532,19.736 107.995,17.272 109.981,17.272 110.744,16.509 110.744,12.927 111.841,11.83 SW2.2@112.54,11.83 SW2.2@119.29,11.83 SW2.2@119.913,11.83
  Mid-Layer 1 w0.152: v2@90.887,24.847 93.645,24.847 94.132,24.359 94.132,23.436 93.836,23.139 93.836,19.82 94.148,19.507 v1(94.928,19.507)
  Bottom Layer w0.152: v1(94.928,19.507) 95.157,19.736 v1(105.004,19.736)
  other v2: 90.912,24.822
CTS: SB50.1 U8.16 | length 28.9
  Top Layer w0.152: U8.16@92.548,22.397 v1@92.907,22.397 ; v1@93.04,22.53 v1@92.907,22.397 ; v1@93.167,22.479 93.085,22.397 v1@92.907,22.397
  Top Layer w0.203: v1(70.536,18.644) 70.963,18.644 SB50.1@71.138,18.644
  Bottom Layer w0.152: v1(70.536,18.644) 71.839,19.947 71.839,21.794 73.998,23.952 83.887,23.952 86.199,21.641 88.664,21.641 89.756,22.733 92.913,22.733 v1@93.167,22.479
  other v1: 92.989,22.454
D_N: D60.2 J3.2 TP13.1 U1.AD4 | length 44
  Top Layer w0.138: J3.2@89.086,5.985 89.086,8.495 ccw(c88.578,8.495) 88.938,8.855 D60.2@88.402,9.39 88.912,9.899 ccw(c88.114,10.697) 89.242,10.697 89.242,12.23 cw(c91.338,12.23) 91.338,14.326 ccw(c91.338,16.411) 92.813,14.936 94.183,16.307 ; 94.204,16.333 cw(c95.199,16.129) 94.995,17.124 ; 94.998,17.121 106.088,28.211 cw(c108.136,26.162) 108.136,29.06 113.295,29.06 ccw(c113.295,29.693) 113.928,29.693 113.928,32.467 ccw(c113.29,32.467) 113.741,32.918 113.244,33.415 cw(c113.89,34.061) 112.977,34.061 ; U1.AD4@112.914,34.367 112.982,34.299 112.982,34.061
D_P: D60.3 J3.3 TP14.1 U1.AD6 | length 44
  Top Layer w0.138: J3.3@89.734,5.983 89.734,8.495 cw(c90.242,8.495) 89.883,8.855 ; 89.883,8.854 D60.3@90.429,9.4 ; D60.3@90.44,9.39 89.931,9.899 cw(c90.729,10.697) 89.6,10.697 89.6,12.232 cw(c91.338,12.232) 91.338,13.97 ccw(c91.338,16.418) 93.069,14.687 93.522,15.139 ccw(c93.294,16.129) 94.284,15.901 ; 94.284,15.902 106.34,27.958 cw(c108.136,26.162) 108.136,28.702 113.295,28.702 ; 113.295,28.702 ccw(c113.295,29.693) 114.286,29.693 114.286,32.467 ccw(c113.29,32.467) 113.994,33.172 113.498,33.669 cw(c113.89,34.061) 113.335,34.061 113.335,34.289 U1.AD6@113.414,34.367
DEC1: C5.1 U1.C1 | length 2.3
  Top Layer w0.25: C5.1@109.824,40.455 110.851,40.455 111.439,39.867 U1.C1@111.914,39.867
DEC3: C11.1 U1.D23 | length 3
  Top Layer w0.152: U1.D23@117.914,39.617 117.919,39.617 118.244,39.942 118.514,39.942 120.114,41.542 C11.1@120.164,41.542
DEC4_6: C10.2 C15.2 C16.1 L3.1 U1.B5 U1.E24 | length 19.2
  Top Layer w0.15: U1.E24@118.414,39.367 118.414,39.423 119.657,40.667 v1(121.478,40.667)
  Top Layer w0.25: L3.1@111.864,44.992 111.864,42.867 112.139,42.592 v1(112.139,41.729) 113.064,40.805 113.064,40.544 113.164,40.444 U1.B5@113.164,40.367
  Bottom Layer w0.25: v1(112.139,41.729) 112.852,42.443 118.161,42.443 119.937,40.667 v1(121.478,40.667)
GND: Bat1.2 C1.2 C2.2 C3.1 C4.1 C5.2 C6.2 C7.2 C8.2 C9.2 C10.1 C11.2 C12.2 C13.2 C14.2 C15.1 C16.2 C17.1 C18.1 C19.2 C20.2 C21.2 C22.2 C23.2 C24.2 C25.2 C26.2 C27.2 C28.2 C29.1 C30.2 C31.2 C32.2 C33.2 C34.2 C35.1 C36.1 C37.2 C38.2 C39.2 C40.1 C42.1 C45.1 C46.2 C47.1 C48.1 C49.1 C50.1 C51.1 C52.1 C53.1 C60.1 C61.1 C62.1 C63.2 C64.1 C65.1 C66.1 C67.1 C68.1 C69.1 C80.1 C82.1 C83.1 C85.1 C86.1 C88.1 C89.1 C90.1 C91.1 C92.1 C93.1 C94.1 C96.1 D60.1 D61.1 FB62.2 FB63.2 FB64.2 FB65.2 J1.2 J4.3 J6.1 P1.6 P1.7 P4.7 P7.6 P7.7 P10.7 P13.1 P13.3 P13.5 P13.7 P13.9 P13.11 P13.12 P13.13 P13.14 P13.15 P14.1 P14.3 P14.5 P14.7 P14.9 P14.11 P15.1 P15.3 P15.5 P15.7 P15.9 P15.11 P15.13 P15.15 P16.1 P16.3 P16.5 P16.7 P16.9 P16.11 P16.13 P16.14 P16.15 P16.17 P16.19 P17.1 P17.3 P17.5 P17.7 P17.9 P17.11 P17.13 P17.15 P18.3 P18.5 P18.9 P19.5 P21.1 P24.18 P25.3 P25.5 P25.9 P25.15 P25.17 P25.19 P27.1 Q1.2 Q2.2 Q3.2 Q40.1 Q81.1 Q81.4 Q82.2 Q83.2 Q84.1 R9.2 R10.2 R20.2 R26.2 R40.2 R62.1 R63.1 R69.1 R84.1 R85.2 R88.2 R92.2 R94.2 SB32.1 SW1.1 SW2.1 SW3.1 SW4.1 SW5.1 SW6.1 SW6.4 SW7.1 SW11.3 TP12.1 TP39.1 TP40.1 TP41.1 U1.74 U1.B7 U1.F23 U2.104 U2.A25 U2.B12 U2.B26 U2.G1 U2.H2 U2.J31 U3.4 U3.9 U4.B1 U5.5 U5.6 U6.6 U7.6 U8.6 U9.B1 U10.B1 U11.2 U11.5 U11.7 U12.2 U12.4 U12.7 U13.B1 U14.B1 U15.B1 U16.B1 U17.B1 U18.B1 U19.4 U20.3 U21.2 U24.B1 U25.3 U26.2 X1.2 X1.4 X3.2 X3.4 | length 86.2
  Top Layer w0.145: U1.F23@117.914,39.117 118.019,39.012 119.335,39.012 C3.1@119.715,39.393
  Top Layer w0.165: U2.A25@40.039,33.227 U2.B26@40.239,32.827
  Top Layer w0.187: v1(34.539,31.827) U2.G1@35.039,31.827 U2.H2@35.439,31.627 U2.104@36.139,31.627 ; v1@37.225,34.375 37.308,34.292 37.308,33.101 ; 37.308,33.097 U2.B12@37.439,32.827
  Top Layer w0.2: U2.A25@40.039,33.227 C39.2@40.039,34.323
  Top Layer w0.203: v1@13.284,39.385 Q40.1@14.168,39.385 ; v2(18.567,12.319) 18.821,12.065 U21.2@18.821,11.364 ; 21.006,12.217 21.057,12.167 v2(21.387,12.167) 21.666,11.887 U26.2@21.666,11.364 ; C94.1@22.231,8.407 23.114,8.407 v1(23.216,8.509) ; U17.B1@23.517,18.082 v1@23.517,18.691 ; U25.3@25.161,9.464 v2(25.161,10.17) ; U16.B1@25.778,18.082 v2(26.387,18.082) ; U18.B1@30.319,17.386 30.859,17.386 v1(30.884,17.412) ; C92.1@51.75,41.225 v1(51.75,41.675) ; v1@52.669,41.456 U9.B1@53.044,41.456 ; U10.B1@84.725,12.775 84.725,13.225 ; 103.207,28.382 ccw(c103.276,29.032) 103.927,29.1
  Top Layer w0.225: U2.104@37.039,31.427 U2.104@38.439,30.027 U2.104@38.734,30.027 ; U2.104@37.439,31.427 U2.B12@37.439,32.827 ; U2.104@39.839,31.427 U2.104@40.239,31.427 ; U2.B26@40.239,32.827 U2.104@40.239,31.427 ; U2.J31@41.439,31.427 U2.104@40.239,31.427
  Top Layer w0.229: U5.6@75.157,19.507 v1(75.946,19.507)
  Top Layer w0.25: U12.4@12.35,24.475 U12.7@12.35,25.125 ; U12.7@12.85,25.45 U12.2@12.85,26.425 ; U11.2@19.751,20.218 U11.7@20.726,20.218 U11.5@21.701,20.218 ; U24.B1@27.283,30.553 v2(27.283,31.22) ; v1(33.275,32) 33.455,32 33.457,32.002 33.871,32.002 C24.2@33.881,31.992 ; C25.2@33.379,29.677 33.379,30.154 v1(33.475,30.25) ; C24.2@33.939,31.992 C24.2@33.881,31.992 ; v1(34.539,31.827) 34.046,31.827 C24.2@33.881,31.992 ; v1(36.075,25.175) 36.385,24.865 R10.2@36.7,24.865 ; v1(36.5,36.525) 36.814,36.211 36.814,35.957 36.939,35.832 C36.1@36.989,35.832 36.639,35.482 C40.1@36.639,35.052 ; C40.1@36.639,34.957 C40.1@36.639,35.052 ; v1@37.064,34.477 37.064,34.627 C40.1@36.639,35.052 ; C27.2@37.415,24.867 37.958,24.867 v1(38,24.825) ; v1(39.05,24.825) 39.092,24.867 C31.2@39.564,24.867 ; C39.2@40.039,34.323 40.51,34.323 v1(40.564,34.377) ; C28.2@40.289,35.052 40.564,34.777 v1(40.564,34.377) ; C29.1@41.264,35.052 41.264,34.89 40.75,34.377 v1(40.564,34.377) ; R20.2@43.285,27.025 43.875,27.025 v1(43.975,27.125) 43.5,27.6 Q3.2@43.325,27.6 ; v1(82.372,19.71) 82.572,19.51 U7.6@83.165,19.51 83.715,19.51 v1(83.922,19.304) ; P25.5@82.55,38.145 82.55,36.754 82.956,36.347 ; U4.B1@107.944,52.881 107.948,52.881 108.15,53.083 v1(108.15,53.975) v1@108.15,53.997 ; v1@113.506,41.26 113.506,40.699 113.664,40.541 U1.B7@113.664,40.367 U1.74@113.664,39.117 ; U1.74@115.164,37.617 116.664,39.117 U1.F23@117.914,39.117
  Top Layer w0.254: C65.1@9.8,30.074 9.8,30.059 9.808,30.051 9.823,30.051 v1(10.675,30.05) ; C64.1@10.647,29.058 v1@10.647,30.048 ; v1(35.916,13.97) 36.064,14.119 Q83.2@36.064,14.687 ; v1(59.842,18.999) 59.992,19.148 U6.6@59.992,19.792 59.992,20.52 60.122,20.65 ; J4.3@60.325,43.18 60.995,43.18 v1(61.275,42.9) ; C62.1@91.632,11.817 92.35,11.817 92.544,12.011 C61.1@92.544,12.032 ; v1(91.796,25.933) 92.148,25.581 U8.6@92.148,24.847 92.148,24.254 v1@91.973,24.079 ; FB62.2@93.614,12.033 93.614,12.979 ; 106.756,31.242 v1@107.613,31.242 ; C6.2@107.613,31.992 v1@107.613,31.242 ; v1@107.664,31.117 107.613,31.168 v1@107.613,31.242 ; v1@109.093,31.242 109.039,31.242 v1@107.613,31.242 ; C16.2@113.301,42.443 113.301,43.294 C15.1@113.489,43.481 ; U3.4@116.689,25.578 116.689,25.808 v2(116.84,25.959) ; v1(118.214,41.417) 118.389,41.592 C12.2@118.389,42.167
  Top Layer w0.3: R88.2@32.588,38.741 32.588,38.862 32.995,39.268
  Top Layer w0.381: FB63.2@6.164,28.337 FB63.2@6.147,28.354 6.668,28.354 v1(6.914,28.6) ; D61.1@8.944,33.105 8.944,33.844 v1@9.725,34.625 ; v2(20.028,14.097) U14.B1@20.237,14.307 ; v2(20.168,12.548) 20.168,12.827 U15.B1@20.231,12.89 ; U19.4@21.993,24.806 21.993,24.591 v1(22.479,24.105) ; Q84.1@23.601,15.301 v1@23.967,15.301 ; v2(86.197,9.83) 87.32,9.83 87.325,9.825 ; v1(88.087,8.23) 87.605,8.712 C60.1@87.407,8.712 87.407,9.291 v1(87.325,9.373) 87.325,9.825 ; v2(88.402,11.09) 87.772,11.09 87.325,10.643 87.325,9.825 ; C62.1@91.632,11.817 91.632,12.613 91.999,12.979 93.614,12.979 94.412,12.979 ; C19.2@109.014,31.992 109.014,31.267 109.039,31.242 v1(109.164,31.117) ; v2@111.364,30.709 C20.2@111.364,31.267 ; v2@112.539,30.632 C21.2@112.539,31.267 ; C7.2@115.49,31.992 115.49,31.221 v1(115.494,31.217)
  Top Layer w0.5: v1(6.164,27.725) FB63.2@6.164,28.337 ; U12.7@12.87,25.47 12.9,25.5 v1(14.05,25.5) C82.1@14.725,25.5 ; C82.1@14.612,25.47 C83.1@15.918,25.47 ; C83.1@15.918,25.49 C96.1@17.215,25.49